# EAGLE board Qwiic_OLED_Breakout-Panel_v11 (EAGLE 9.6.2), part 1 of 3
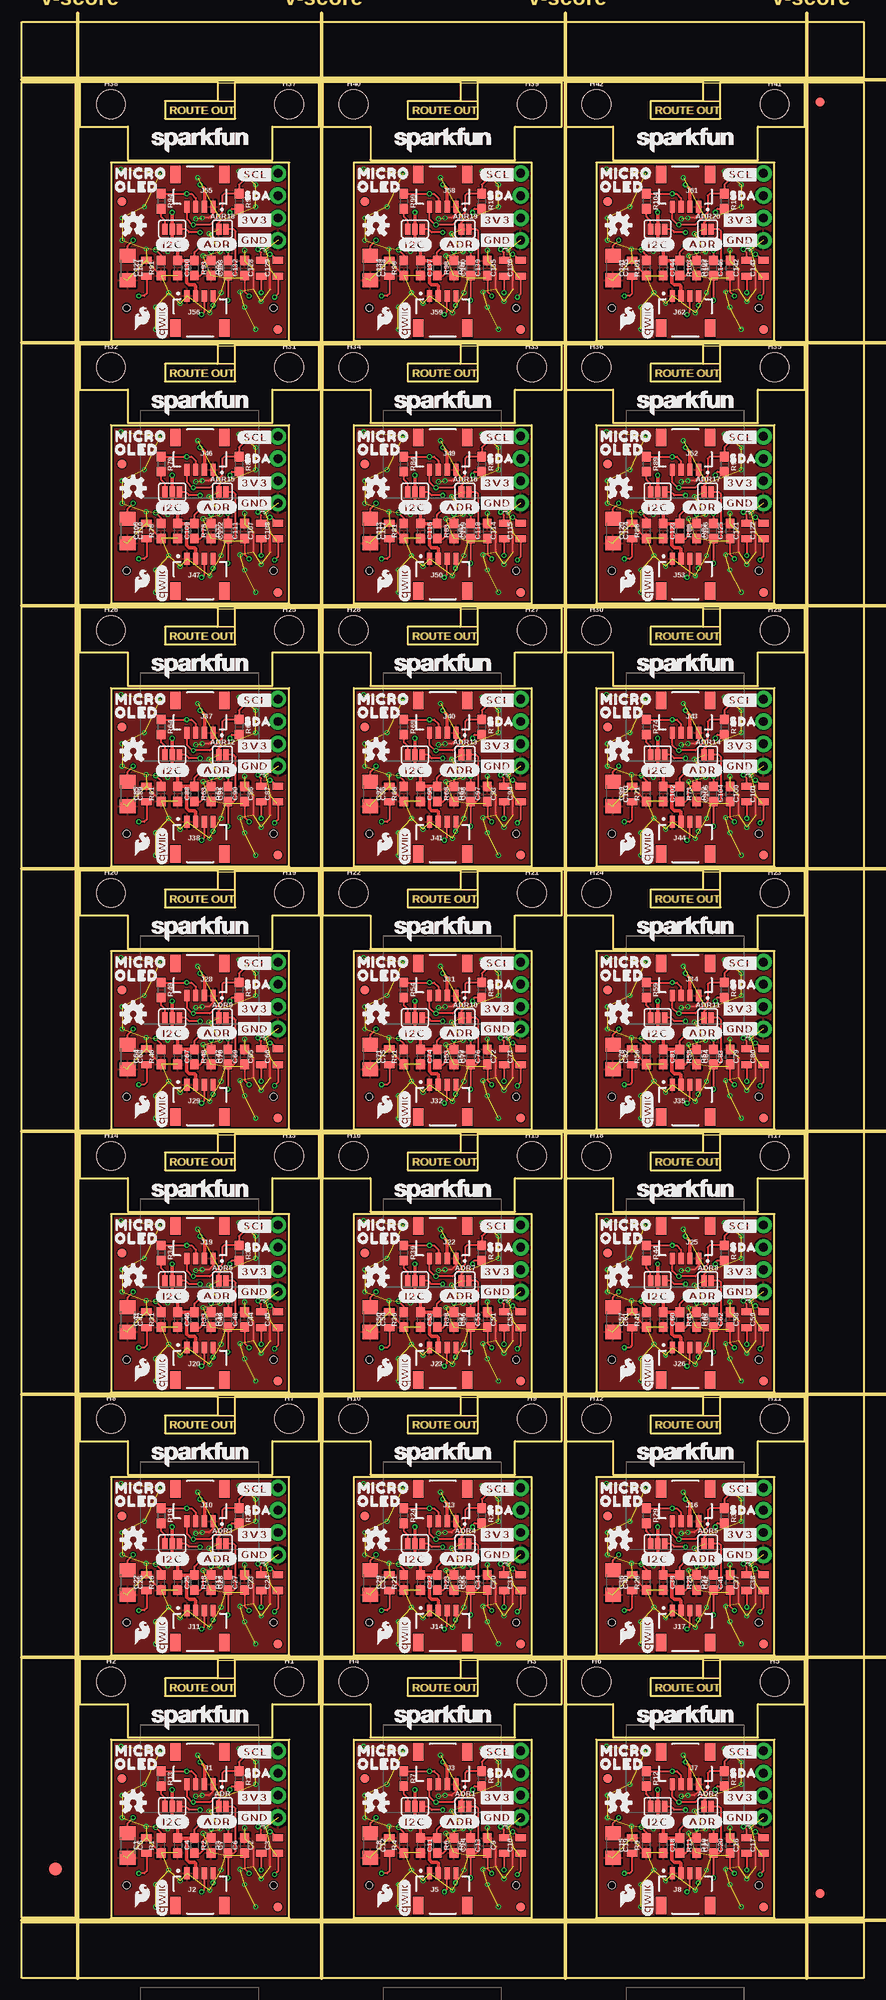
[diagram p0: board, top side]
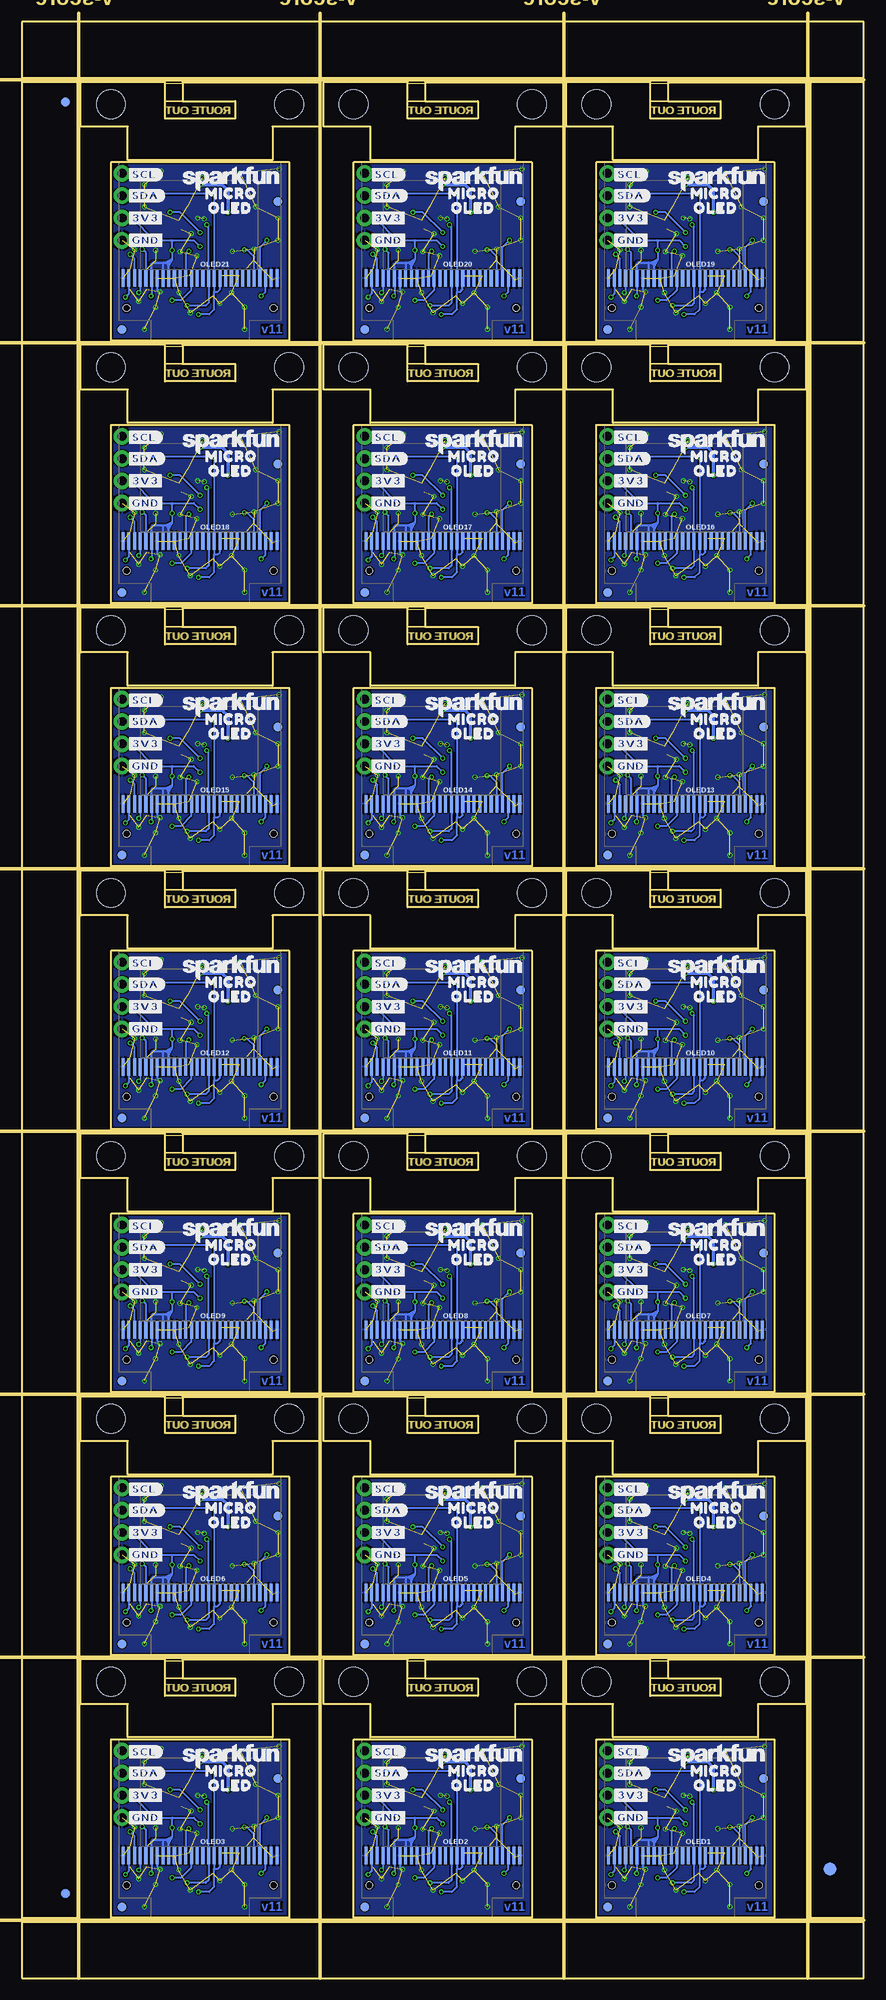
[diagram p1: board, bottom side, seen from below]

Size 96.01 x 223.01 mm. Coordinates in mm from the lower left corner, seen from the top.
Outline: 394 segments
Copper layers (1*16): Top 0.035mm / dielectric 1.5mm / Bottom 0.035mm
Design rules "Qwiic_OLED_Breakout": minimum track width 5mil, minimum drill 0.3mm, track to track 5mil, track to pad 5mil, pad to pad 5mil, via to via 5mil, smd to smd 5mil, copper to edge 7mil, drill to drill 7mil, minimum pad ring 5mil, minimum via ring 5mil, stop-mask expansion 2.5mil, vias tented up to drill 25mil, thermal gap 10mil
Milling: area 16.3,32.2 to 24.3,34.2; area 22.3,34.2 to 24.3,36.2; area 44,32.2 to 52,34.2; area 50,34.2 to 52,36.2; area 71.7,32.2 to 79.7,34.2; area 77.7,34.2 to 79.7,36.2; area 16.3,62.1 to 24.3,64.1; area 22.3,64.1 to 24.3,66.1; area 44,62.1 to 52,64.1; area 50,64.1 to 52,66.1; area 71.7,62.1 to 79.7,64.1; area 77.7,64.1 to 79.7,66.1; 30 more areas; 12 lines

## Footprints (pad centres in the part's own frame; a part is rotated, then mirrored left to right if it is on the bottom)
SMT-JUMPER_2_NO_SILK = smd 0.635 x 1.27: 1 -0.406,0; 2 0.406,0
0805 = smd 0.8 x 1.2: 1 -0.9,0; 2 0.9,0
0603 = smd 1.1 x 1: 1 -0.85,0; 2 0.85,0
1206 = smd 1.6 x 1.8: 1 -1.4,0; 2 1.4,0
FIDUCIAL-1X2 = smd 1 x 1: 1 0,0
FIDUCIAL-1.5X3 = smd 1.5 x 1.5: 1 0,0
STAND-OFF = hole 3.302: 0,0
SMT-JUMPER_3_2-NC_PASTE_SILK = smd 0.635 x 1.27: 1 -0.813,0; 2 0,0; 3 0.813,0
JST04_1MM_RA = smd 0.6 x 1.35: 1 -1.5,0; 2 -0.5,0; 3 0.5,0; 4 1.5,0 | smd 1.2 x 2: NC1 2.8,-3.675; NC2 -2.8,-3.675
1X04_NO_SILK = drill 1.016 pad 1.88: 1 0,0; 2 2.54,0; 3 5.08,0; 4 7.62,0
OLED-0.66-64X48 = smd 0.35 x 2: 1 -8.775,0; 2 -8.125,0; 3 -7.475,0; 4 -6.825,0; 5 -6.175,0; 6 -5.525,0; 7 -4.875,0; 8 -4.225,0; 9 -3.575,0; 10 -2.925,0; 11 -2.275,0; 12 -1.625,0; 13 -0.975,0; 14 -0.325,0; 15 0.325,0; 16 0.975,0; 17 1.625,0; 18 2.275,0; 19 2.925,0; 20 3.575,0; 21 4.225,0; 22 4.875,0; 23 5.525,0; 24 6.175,0; 25 6.825,0; 26 7.475,0; 27 8.125,0; 28 8.775,0 | hole 0.8: 8.375,-3.4; -8.375,-3.4

## Placement (x,y rotation side)
ADR  JUMPER-SMT_2_NO_SILK  [SMT-JUMPER_2_NO_SILK]  22.86,19.56 0 top
ADR1  JUMPER-SMT_2_NO_SILK  [SMT-JUMPER_2_NO_SILK]  50.55,19.56 0 top
ADR2  JUMPER-SMT_2_NO_SILK  [SMT-JUMPER_2_NO_SILK]  78.23,19.56 0 top
ADR3  JUMPER-SMT_2_NO_SILK  [SMT-JUMPER_2_NO_SILK]  22.86,49.53 0 top
ADR4  JUMPER-SMT_2_NO_SILK  [SMT-JUMPER_2_NO_SILK]  50.55,49.53 0 top
ADR5  JUMPER-SMT_2_NO_SILK  [SMT-JUMPER_2_NO_SILK]  78.23,49.53 0 top
ADR6  JUMPER-SMT_2_NO_SILK  [SMT-JUMPER_2_NO_SILK]  22.86,79.5 0 top
ADR7  JUMPER-SMT_2_NO_SILK  [SMT-JUMPER_2_NO_SILK]  50.55,79.5 0 top
ADR8  JUMPER-SMT_2_NO_SILK  [SMT-JUMPER_2_NO_SILK]  78.23,79.5 0 top
ADR9  JUMPER-SMT_2_NO_SILK  [SMT-JUMPER_2_NO_SILK]  22.86,109.47 0 top
ADR10  JUMPER-SMT_2_NO_SILK  [SMT-JUMPER_2_NO_SILK]  50.55,109.47 0 top
ADR11  JUMPER-SMT_2_NO_SILK  [SMT-JUMPER_2_NO_SILK]  78.23,109.47 0 top
ADR12  JUMPER-SMT_2_NO_SILK  [SMT-JUMPER_2_NO_SILK]  22.86,139.45 0 top
ADR13  JUMPER-SMT_2_NO_SILK  [SMT-JUMPER_2_NO_SILK]  50.55,139.45 0 top
ADR14  JUMPER-SMT_2_NO_SILK  [SMT-JUMPER_2_NO_SILK]  78.23,139.45 0 top
ADR15  JUMPER-SMT_2_NO_SILK  [SMT-JUMPER_2_NO_SILK]  22.86,169.42 0 top
ADR16  JUMPER-SMT_2_NO_SILK  [SMT-JUMPER_2_NO_SILK]  50.55,169.42 0 top
ADR17  JUMPER-SMT_2_NO_SILK  [SMT-JUMPER_2_NO_SILK]  78.23,169.42 0 top
ADR18  JUMPER-SMT_2_NO_SILK  [SMT-JUMPER_2_NO_SILK]  22.86,199.39 0 top
ADR19  JUMPER-SMT_2_NO_SILK  [SMT-JUMPER_2_NO_SILK]  50.55,199.39 0 top
ADR20  JUMPER-SMT_2_NO_SILK  [SMT-JUMPER_2_NO_SILK]  78.23,199.39 0 top
C1  2.2uF  [0805]  14.22,15.11 90 top
C2  1.0uF  [0805]  27.3,15.11 90 top
C3  1.0uF  [0805]  29.21,15.11 90 top
C4  1.0uF  [0603]  17.78,15.11 270 top
C5  4.7uF  [1206]  12.06,15.11 270 top
C6  1.0uF  [0603]  25.4,15.11 90 top
C7  1.0uF  [0603]  21.59,15.11 270 top
C8  2.2uF  [0805]  41.91,15.11 90 top
C9  1.0uF  [0805]  54.99,15.11 90 top
C10  1.0uF  [0805]  56.9,15.11 90 top
C11  1.0uF  [0603]  45.47,15.11 270 top
C12  4.7uF  [1206]  39.75,15.11 270 top
C13  1.0uF  [0603]  53.09,15.11 90 top
C14  1.0uF  [0603]  49.28,15.11 270 top
C15  2.2uF  [0805]  69.6,15.11 90 top
C16  1.0uF  [0805]  82.68,15.11 90 top
C17  1.0uF  [0805]  84.58,15.11 90 top
C18  1.0uF  [0603]  73.15,15.11 270 top
C19  4.7uF  [1206]  67.44,15.11 270 top
C20  1.0uF  [0603]  80.77,15.11 90 top
C21  1.0uF  [0603]  76.96,15.11 270 top
C22  2.2uF  [0805]  14.22,45.09 90 top
C23  1.0uF  [0805]  27.3,45.09 90 top
C24  1.0uF  [0805]  29.21,45.09 90 top
C25  1.0uF  [0603]  17.78,45.09 270 top
C26  4.7uF  [1206]  12.06,45.09 270 top
C27  1.0uF  [0603]  25.4,45.09 90 top
C28  1.0uF  [0603]  21.59,45.09 270 top
C29  2.2uF  [0805]  41.91,45.09 90 top
C30  1.0uF  [0805]  54.99,45.09 90 top
C31  1.0uF  [0805]  56.9,45.09 90 top
C32  1.0uF  [0603]  45.47,45.09 270 top
C33  4.7uF  [1206]  39.75,45.09 270 top
C34  1.0uF  [0603]  53.09,45.09 90 top
C35  1.0uF  [0603]  49.28,45.09 270 top
C36  2.2uF  [0805]  69.6,45.09 90 top
C37  1.0uF  [0805]  82.68,45.09 90 top
C38  1.0uF  [0805]  84.58,45.09 90 top
C39  1.0uF  [0603]  73.15,45.09 270 top
C40  4.7uF  [1206]  67.44,45.09 270 top
C41  1.0uF  [0603]  80.77,45.09 90 top
C42  1.0uF  [0603]  76.96,45.09 270 top
C43  2.2uF  [0805]  14.22,75.06 90 top
C44  1.0uF  [0805]  27.3,75.06 90 top
C45  1.0uF  [0805]  29.21,75.06 90 top
C46  1.0uF  [0603]  17.78,75.06 270 top
C47  4.7uF  [1206]  12.06,75.06 270 top
C48  1.0uF  [0603]  25.4,75.06 90 top
C49  1.0uF  [0603]  21.59,75.06 270 top
C50  2.2uF  [0805]  41.91,75.06 90 top
C51  1.0uF  [0805]  54.99,75.06 90 top
C52  1.0uF  [0805]  56.9,75.06 90 top
C53  1.0uF  [0603]  45.47,75.06 270 top
C54  4.7uF  [1206]  39.75,75.06 270 top
C55  1.0uF  [0603]  53.09,75.06 90 top
C56  1.0uF  [0603]  49.28,75.06 270 top
C57  2.2uF  [0805]  69.6,75.06 90 top
C58  1.0uF  [0805]  82.68,75.06 90 top
C59  1.0uF  [0805]  84.58,75.06 90 top
C60  1.0uF  [0603]  73.15,75.06 270 top
C61  4.7uF  [1206]  67.44,75.06 270 top
C62  1.0uF  [0603]  80.77,75.06 90 top
C63  1.0uF  [0603]  76.96,75.06 270 top
C64  2.2uF  [0805]  14.22,105.03 90 top
C65  1.0uF  [0805]  27.3,105.03 90 top
C66  1.0uF  [0805]  29.21,105.03 90 top
C67  1.0uF  [0603]  17.78,105.03 270 top
C68  4.7uF  [1206]  12.06,105.03 270 top
C69  1.0uF  [0603]  25.4,105.03 90 top
C70  1.0uF  [0603]  21.59,105.03 270 top
C71  2.2uF  [0805]  41.91,105.03 90 top
C72  1.0uF  [0805]  54.99,105.03 90 top
C73  1.0uF  [0805]  56.9,105.03 90 top
C74  1.0uF  [0603]  45.47,105.03 270 top
C75  4.7uF  [1206]  39.75,105.03 270 top
C76  1.0uF  [0603]  53.09,105.03 90 top
C77  1.0uF  [0603]  49.28,105.03 270 top
C78  2.2uF  [0805]  69.6,105.03 90 top
C79  1.0uF  [0805]  82.68,105.03 90 top
C80  1.0uF  [0805]  84.58,105.03 90 top
C81  1.0uF  [0603]  73.15,105.03 270 top
C82  4.7uF  [1206]  67.44,105.03 270 top
C83  1.0uF  [0603]  80.77,105.03 90 top
C84  1.0uF  [0603]  76.96,105.03 270 top
C85  2.2uF  [0805]  14.22,135 90 top
C86  1.0uF  [0805]  27.3,135 90 top
C87  1.0uF  [0805]  29.21,135 90 top
C88  1.0uF  [0603]  17.78,135 270 top
C89  4.7uF  [1206]  12.06,135 270 top
C90  1.0uF  [0603]  25.4,135 90 top
C91  1.0uF  [0603]  21.59,135 270 top
C92  2.2uF  [0805]  41.91,135 90 top
C93  1.0uF  [0805]  54.99,135 90 top
C94  1.0uF  [0805]  56.9,135 90 top
C95  1.0uF  [0603]  45.47,135 270 top
C96  4.7uF  [1206]  39.75,135 270 top
C97  1.0uF  [0603]  53.09,135 90 top
C98  1.0uF  [0603]  49.28,135 270 top
C99  2.2uF  [0805]  69.6,135 90 top
C100  1.0uF  [0805]  82.68,135 90 top
C101  1.0uF  [0805]  84.58,135 90 top
C102  1.0uF  [0603]  73.15,135 270 top
C103  4.7uF  [1206]  67.44,135 270 top
C104  1.0uF  [0603]  80.77,135 90 top
C105  1.0uF  [0603]  76.96,135 270 top
C106  2.2uF  [0805]  14.22,164.97 90 top
C107  1.0uF  [0805]  27.3,164.97 90 top
C108  1.0uF  [0805]  29.21,164.97 90 top
C109  1.0uF  [0603]  17.78,164.97 270 top
C110  4.7uF  [1206]  12.06,164.97 270 top
C111  1.0uF  [0603]  25.4,164.97 90 top
C112  1.0uF  [0603]  21.59,164.97 270 top
C113  2.2uF  [0805]  41.91,164.97 90 top
C114  1.0uF  [0805]  54.99,164.97 90 top
C115  1.0uF  [0805]  56.9,164.97 90 top
C116  1.0uF  [0603]  45.47,164.97 270 top
C117  4.7uF  [1206]  39.75,164.97 270 top
C118  1.0uF  [0603]  53.09,164.97 90 top
C119  1.0uF  [0603]  49.28,164.97 270 top
C120  2.2uF  [0805]  69.6,164.97 90 top
C121  1.0uF  [0805]  82.68,164.97 90 top
C122  1.0uF  [0805]  84.58,164.97 90 top
C123  1.0uF  [0603]  73.15,164.97 270 top
C124  4.7uF  [1206]  67.44,164.97 270 top
C125  1.0uF  [0603]  80.77,164.97 90 top
C126  1.0uF  [0603]  76.96,164.97 270 top
C127  2.2uF  [0805]  14.22,194.94 90 top
C128  1.0uF  [0805]  27.3,194.94 90 top
C129  1.0uF  [0805]  29.21,194.94 90 top
C130  1.0uF  [0603]  17.78,194.94 270 top
C131  4.7uF  [1206]  12.06,194.94 270 top
C132  1.0uF  [0603]  25.4,194.94 90 top
C133  1.0uF  [0603]  21.59,194.94 270 top
C134  2.2uF  [0805]  41.91,194.94 90 top
C135  1.0uF  [0805]  54.99,194.94 90 top
C136  1.0uF  [0805]  56.9,194.94 90 top
C137  1.0uF  [0603]  45.47,194.94 270 top
C138  4.7uF  [1206]  39.75,194.94 270 top
C139  1.0uF  [0603]  53.09,194.94 90 top
C140  1.0uF  [0603]  49.28,194.94 270 top
C141  2.2uF  [0805]  69.6,194.94 90 top
C142  1.0uF  [0805]  82.68,194.94 90 top
C143  1.0uF  [0805]  84.58,194.94 90 top
C144  1.0uF  [0603]  73.15,194.94 270 top
C145  4.7uF  [1206]  67.44,194.94 270 top
C146  1.0uF  [0603]  80.77,194.94 90 top
C147  1.0uF  [0603]  76.96,194.94 270 top
E$1  [FIDUCIAL-1X2]  91.06,9.65 0 top
E$2  [FIDUCIAL-1X2]  91.06,9.65 0 bottom
E$3  [FIDUCIAL-1X2]  91.06,213.87 0 top
E$4  [FIDUCIAL-1X2]  91.06,213.87 0 bottom
E$5  [FIDUCIAL-1.5X3]  3.81,12.45 0 top
E$6  [FIDUCIAL-1.5X3]  3.81,12.45 0 bottom
FID1  FIDUCIAL1X2  [FIDUCIAL-1X2]  29.21,8.13 0 top
FID2  FIDUCIAL1X2  [FIDUCIAL-1X2]  11.43,22.73 0 top
FID3  FIDUCIAL1X2  [FIDUCIAL-1X2]  11.43,22.73 0 bottom
FID4  FIDUCIAL1X2  [FIDUCIAL-1X2]  29.21,8.13 0 bottom
FID5  FIDUCIAL1X2  [FIDUCIAL-1X2]  56.9,8.13 0 top
FID6  FIDUCIAL1X2  [FIDUCIAL-1X2]  39.12,22.73 0 top
FID7  FIDUCIAL1X2  [FIDUCIAL-1X2]  39.12,22.73 0 bottom
FID8  FIDUCIAL1X2  [FIDUCIAL-1X2]  56.9,8.13 0 bottom
FID9  FIDUCIAL1X2  [FIDUCIAL-1X2]  84.58,8.13 0 top
FID10  FIDUCIAL1X2  [FIDUCIAL-1X2]  66.8,22.73 0 top
FID11  FIDUCIAL1X2  [FIDUCIAL-1X2]  66.8,22.73 0 bottom
FID12  FIDUCIAL1X2  [FIDUCIAL-1X2]  84.58,8.13 0 bottom
FID13  FIDUCIAL1X2  [FIDUCIAL-1X2]  29.21,38.1 0 top
FID14  FIDUCIAL1X2  [FIDUCIAL-1X2]  11.43,52.7 0 top
FID15  FIDUCIAL1X2  [FIDUCIAL-1X2]  11.43,52.7 0 bottom
FID16  FIDUCIAL1X2  [FIDUCIAL-1X2]  29.21,38.1 0 bottom
FID17  FIDUCIAL1X2  [FIDUCIAL-1X2]  56.9,38.1 0 top
FID18  FIDUCIAL1X2  [FIDUCIAL-1X2]  39.12,52.7 0 top
FID19  FIDUCIAL1X2  [FIDUCIAL-1X2]  39.12,52.7 0 bottom
FID20  FIDUCIAL1X2  [FIDUCIAL-1X2]  56.9,38.1 0 bottom
FID21  FIDUCIAL1X2  [FIDUCIAL-1X2]  84.58,38.1 0 top
FID22  FIDUCIAL1X2  [FIDUCIAL-1X2]  66.8,52.7 0 top
FID23  FIDUCIAL1X2  [FIDUCIAL-1X2]  66.8,52.7 0 bottom
FID24  FIDUCIAL1X2  [FIDUCIAL-1X2]  84.58,38.1 0 bottom
FID25  FIDUCIAL1X2  [FIDUCIAL-1X2]  29.21,68.07 0 top
FID26  FIDUCIAL1X2  [FIDUCIAL-1X2]  11.43,82.68 0 top
FID27  FIDUCIAL1X2  [FIDUCIAL-1X2]  11.43,82.68 0 bottom
FID28  FIDUCIAL1X2  [FIDUCIAL-1X2]  29.21,68.07 0 bottom
FID29  FIDUCIAL1X2  [FIDUCIAL-1X2]  56.9,68.07 0 top
FID30  FIDUCIAL1X2  [FIDUCIAL-1X2]  39.12,82.68 0 top
FID31  FIDUCIAL1X2  [FIDUCIAL-1X2]  39.12,82.68 0 bottom
FID32  FIDUCIAL1X2  [FIDUCIAL-1X2]  56.9,68.07 0 bottom
FID33  FIDUCIAL1X2  [FIDUCIAL-1X2]  84.58,68.07 0 top
FID34  FIDUCIAL1X2  [FIDUCIAL-1X2]  66.8,82.68 0 top
FID35  FIDUCIAL1X2  [FIDUCIAL-1X2]  66.8,82.68 0 bottom
FID36  FIDUCIAL1X2  [FIDUCIAL-1X2]  84.58,68.07 0 bottom
FID37  FIDUCIAL1X2  [FIDUCIAL-1X2]  29.21,98.04 0 top
FID38  FIDUCIAL1X2  [FIDUCIAL-1X2]  11.43,112.65 0 top
FID39  FIDUCIAL1X2  [FIDUCIAL-1X2]  11.43,112.65 0 bottom
FID40  FIDUCIAL1X2  [FIDUCIAL-1X2]  29.21,98.04 0 bottom
FID41  FIDUCIAL1X2  [FIDUCIAL-1X2]  56.9,98.04 0 top
FID42  FIDUCIAL1X2  [FIDUCIAL-1X2]  39.12,112.65 0 top
FID43  FIDUCIAL1X2  [FIDUCIAL-1X2]  39.12,112.65 0 bottom
FID44  FIDUCIAL1X2  [FIDUCIAL-1X2]  56.9,98.04 0 bottom
FID45  FIDUCIAL1X2  [FIDUCIAL-1X2]  84.58,98.04 0 top
FID46  FIDUCIAL1X2  [FIDUCIAL-1X2]  66.8,112.65 0 top
FID47  FIDUCIAL1X2  [FIDUCIAL-1X2]  66.8,112.65 0 bottom
FID48  FIDUCIAL1X2  [FIDUCIAL-1X2]  84.58,98.04 0 bottom
FID49  FIDUCIAL1X2  [FIDUCIAL-1X2]  29.21,128.02 0 top
FID50  FIDUCIAL1X2  [FIDUCIAL-1X2]  11.43,142.62 0 top
FID51  FIDUCIAL1X2  [FIDUCIAL-1X2]  11.43,142.62 0 bottom
FID52  FIDUCIAL1X2  [FIDUCIAL-1X2]  29.21,128.02 0 bottom
FID53  FIDUCIAL1X2  [FIDUCIAL-1X2]  56.9,128.02 0 top
FID54  FIDUCIAL1X2  [FIDUCIAL-1X2]  39.12,142.62 0 top
FID55  FIDUCIAL1X2  [FIDUCIAL-1X2]  39.12,142.62 0 bottom
FID56  FIDUCIAL1X2  [FIDUCIAL-1X2]  56.9,128.02 0 bottom
FID57  FIDUCIAL1X2  [FIDUCIAL-1X2]  84.58,128.02 0 top
FID58  FIDUCIAL1X2  [FIDUCIAL-1X2]  66.8,142.62 0 top
FID59  FIDUCIAL1X2  [FIDUCIAL-1X2]  66.8,142.62 0 bottom
FID60  FIDUCIAL1X2  [FIDUCIAL-1X2]  84.58,128.02 0 bottom
FID61  FIDUCIAL1X2  [FIDUCIAL-1X2]  29.21,157.99 0 top
FID62  FIDUCIAL1X2  [FIDUCIAL-1X2]  11.43,172.59 0 top
FID63  FIDUCIAL1X2  [FIDUCIAL-1X2]  11.43,172.59 0 bottom
FID64  FIDUCIAL1X2  [FIDUCIAL-1X2]  29.21,157.99 0 bottom
FID65  FIDUCIAL1X2  [FIDUCIAL-1X2]  56.9,157.99 0 top
FID66  FIDUCIAL1X2  [FIDUCIAL-1X2]  39.12,172.59 0 top
FID67  FIDUCIAL1X2  [FIDUCIAL-1X2]  39.12,172.59 0 bottom
FID68  FIDUCIAL1X2  [FIDUCIAL-1X2]  56.9,157.99 0 bottom
FID69  FIDUCIAL1X2  [FIDUCIAL-1X2]  84.58,157.99 0 top
FID70  FIDUCIAL1X2  [FIDUCIAL-1X2]  66.8,172.59 0 top
FID71  FIDUCIAL1X2  [FIDUCIAL-1X2]  66.8,172.59 0 bottom
FID72  FIDUCIAL1X2  [FIDUCIAL-1X2]  84.58,157.99 0 bottom
FID73  FIDUCIAL1X2  [FIDUCIAL-1X2]  29.21,187.96 0 top
FID74  FIDUCIAL1X2  [FIDUCIAL-1X2]  11.43,202.56 0 top
FID75  FIDUCIAL1X2  [FIDUCIAL-1X2]  11.43,202.56 0 bottom
FID76  FIDUCIAL1X2  [FIDUCIAL-1X2]  29.21,187.96 0 bottom
FID77  FIDUCIAL1X2  [FIDUCIAL-1X2]  56.9,187.96 0 top
FID78  FIDUCIAL1X2  [FIDUCIAL-1X2]  39.12,202.56 0 top
FID79  FIDUCIAL1X2  [FIDUCIAL-1X2]  39.12,202.56 0 bottom
FID80  FIDUCIAL1X2  [FIDUCIAL-1X2]  56.9,187.96 0 bottom
FID81  FIDUCIAL1X2  [FIDUCIAL-1X2]  84.58,187.96 0 top
FID82  FIDUCIAL1X2  [FIDUCIAL-1X2]  66.8,202.56 0 top
FID83  FIDUCIAL1X2  [FIDUCIAL-1X2]  66.8,202.56 0 bottom
FID84  FIDUCIAL1X2  [FIDUCIAL-1X2]  84.58,187.96 0 bottom
H1  STAND-OFF  [STAND-OFF]  30.48,33.78 0 top
H2  STAND-OFF  [STAND-OFF]  10.16,33.78 0 top
H3  STAND-OFF  [STAND-OFF]  58.17,33.78 0 top
H4  STAND-OFF  [STAND-OFF]  37.85,33.78 0 top
H5  STAND-OFF  [STAND-OFF]  85.85,33.78 0 top
H6  STAND-OFF  [STAND-OFF]  65.53,33.78 0 top
H7  STAND-OFF  [STAND-OFF]  30.48,63.75 0 top
H8  STAND-OFF  [STAND-OFF]  10.16,63.75 0 top
H9  STAND-OFF  [STAND-OFF]  58.17,63.75 0 top
H10  STAND-OFF  [STAND-OFF]  37.85,63.75 0 top
H11  STAND-OFF  [STAND-OFF]  85.85,63.75 0 top
H12  STAND-OFF  [STAND-OFF]  65.53,63.75 0 top
H13  STAND-OFF  [STAND-OFF]  30.48,93.73 0 top
H14  STAND-OFF  [STAND-OFF]  10.16,93.73 0 top
H15  STAND-OFF  [STAND-OFF]  58.17,93.73 0 top
H16  STAND-OFF  [STAND-OFF]  37.85,93.73 0 top
H17  STAND-OFF  [STAND-OFF]  85.85,93.73 0 top
H18  STAND-OFF  [STAND-OFF]  65.53,93.73 0 top
H19  STAND-OFF  [STAND-OFF]  30.48,123.7 0 top
H20  STAND-OFF  [STAND-OFF]  10.16,123.7 0 top
H21  STAND-OFF  [STAND-OFF]  58.17,123.7 0 top
H22  STAND-OFF  [STAND-OFF]  37.85,123.7 0 top
H23  STAND-OFF  [STAND-OFF]  85.85,123.7 0 top
H24  STAND-OFF  [STAND-OFF]  65.53,123.7 0 top
H25  STAND-OFF  [STAND-OFF]  30.48,153.67 0 top
H26  STAND-OFF  [STAND-OFF]  10.16,153.67 0 top
H27  STAND-OFF  [STAND-OFF]  58.17,153.67 0 top
H28  STAND-OFF  [STAND-OFF]  37.85,153.67 0 top
H29  STAND-OFF  [STAND-OFF]  85.85,153.67 0 top
H30  STAND-OFF  [STAND-OFF]  65.53,153.67 0 top
H31  STAND-OFF  [STAND-OFF]  30.48,183.64 0 top
H32  STAND-OFF  [STAND-OFF]  10.16,183.64 0 top
H33  STAND-OFF  [STAND-OFF]  58.17,183.64 0 top
H34  STAND-OFF  [STAND-OFF]  37.85,183.64 0 top
H35  STAND-OFF  [STAND-OFF]  85.85,183.64 0 top
H36  STAND-OFF  [STAND-OFF]  65.53,183.64 0 top
H37  STAND-OFF  [STAND-OFF]  30.48,213.61 0 top
H38  STAND-OFF  [STAND-OFF]  10.16,213.61 0 top
H39  STAND-OFF  [STAND-OFF]  58.17,213.61 0 top
H40  STAND-OFF  [STAND-OFF]  37.85,213.61 0 top
H41  STAND-OFF  [STAND-OFF]  85.85,213.61 0 top
H42  STAND-OFF  [STAND-OFF]  65.53,213.61 0 top
I2C  JUMPER-SMT_3_2-NC_PASTE_SILK  [SMT-JUMPER_3_2-NC_PASTE_SILK]  17.14,19.56 180 top
I2C1  JUMPER-SMT_3_2-NC_PASTE_SILK  [SMT-JUMPER_3_2-NC_PASTE_SILK]  44.83,19.56 180 top
I2C2  JUMPER-SMT_3_2-NC_PASTE_SILK  [SMT-JUMPER_3_2-NC_PASTE_SILK]  72.52,19.56 180 top
I2C3  JUMPER-SMT_3_2-NC_PASTE_SILK  [SMT-JUMPER_3_2-NC_PASTE_SILK]  17.14,49.53 180 top
I2C4  JUMPER-SMT_3_2-NC_PASTE_SILK  [SMT-JUMPER_3_2-NC_PASTE_SILK]  44.83,49.53 180 top
I2C5  JUMPER-SMT_3_2-NC_PASTE_SILK  [SMT-JUMPER_3_2-NC_PASTE_SILK]  72.52,49.53 180 top
I2C6  JUMPER-SMT_3_2-NC_PASTE_SILK  [SMT-JUMPER_3_2-NC_PASTE_SILK]  17.14,79.5 180 top
I2C7  JUMPER-SMT_3_2-NC_PASTE_SILK  [SMT-JUMPER_3_2-NC_PASTE_SILK]  44.83,79.5 180 top
I2C8  JUMPER-SMT_3_2-NC_PASTE_SILK  [SMT-JUMPER_3_2-NC_PASTE_SILK]  72.52,79.5 180 top
I2C9  JUMPER-SMT_3_2-NC_PASTE_SILK  [SMT-JUMPER_3_2-NC_PASTE_SILK]  17.14,109.47 180 top
I2C10  JUMPER-SMT_3_2-NC_PASTE_SILK  [SMT-JUMPER_3_2-NC_PASTE_SILK]  44.83,109.47 180 top
I2C11  JUMPER-SMT_3_2-NC_PASTE_SILK  [SMT-JUMPER_3_2-NC_PASTE_SILK]  72.52,109.47 180 top
I2C12  JUMPER-SMT_3_2-NC_PASTE_SILK  [SMT-JUMPER_3_2-NC_PASTE_SILK]  17.14,139.45 180 top
I2C13  JUMPER-SMT_3_2-NC_PASTE_SILK  [SMT-JUMPER_3_2-NC_PASTE_SILK]  44.83,139.45 180 top
I2C14  JUMPER-SMT_3_2-NC_PASTE_SILK  [SMT-JUMPER_3_2-NC_PASTE_SILK]  72.52,139.45 180 top
I2C15  JUMPER-SMT_3_2-NC_PASTE_SILK  [SMT-JUMPER_3_2-NC_PASTE_SILK]  17.14,169.42 180 top
I2C16  JUMPER-SMT_3_2-NC_PASTE_SILK  [SMT-JUMPER_3_2-NC_PASTE_SILK]  44.83,169.42 180 top
I2C17  JUMPER-SMT_3_2-NC_PASTE_SILK  [SMT-JUMPER_3_2-NC_PASTE_SILK]  72.52,169.42 180 top
I2C18  JUMPER-SMT_3_2-NC_PASTE_SILK  [SMT-JUMPER_3_2-NC_PASTE_SILK]  17.14,199.39 180 top
I2C19  JUMPER-SMT_3_2-NC_PASTE_SILK  [SMT-JUMPER_3_2-NC_PASTE_SILK]  44.83,199.39 180 top
I2C20  JUMPER-SMT_3_2-NC_PASTE_SILK  [SMT-JUMPER_3_2-NC_PASTE_SILK]  72.52,199.39 180 top
J1  QWIIC_RIGHT_ANGLE  [JST04_1MM_RA]  20.32,22.1 180 top
J2  QWIIC_RIGHT_ANGLE  [JST04_1MM_RA]  20.32,11.94 0 top
J3  QWIIC_RIGHT_ANGLE  [JST04_1MM_RA]  48.01,22.1 180 top
J4  [1X04_NO_SILK]  29.21,18.29 90 top
J5  QWIIC_RIGHT_ANGLE  [JST04_1MM_RA]  48.01,11.94 0 top
J6  [1X04_NO_SILK]  56.9,18.29 90 top
J7  QWIIC_RIGHT_ANGLE  [JST04_1MM_RA]  75.69,22.1 180 top
J8  QWIIC_RIGHT_ANGLE  [JST04_1MM_RA]  75.69,11.94 0 top
J9  [1X04_NO_SILK]  84.58,18.29 90 top
J10  QWIIC_RIGHT_ANGLE  [JST04_1MM_RA]  20.32,52.07 180 top
J11  QWIIC_RIGHT_ANGLE  [JST04_1MM_RA]  20.32,41.91 0 top
J12  [1X04_NO_SILK]  29.21,48.26 90 top
J13  QWIIC_RIGHT_ANGLE  [JST04_1MM_RA]  48.01,52.07 180 top
J14  QWIIC_RIGHT_ANGLE  [JST04_1MM_RA]  48.01,41.91 0 top
J15  [1X04_NO_SILK]  56.9,48.26 90 top
J16  QWIIC_RIGHT_ANGLE  [JST04_1MM_RA]  75.69,52.07 180 top
J17  QWIIC_RIGHT_ANGLE  [JST04_1MM_RA]  75.69,41.91 0 top
J18  [1X04_NO_SILK]  84.58,48.26 90 top
J19  QWIIC_RIGHT_ANGLE  [JST04_1MM_RA]  20.32,82.04 180 top
J20  QWIIC_RIGHT_ANGLE  [JST04_1MM_RA]  20.32,71.88 0 top
J21  [1X04_NO_SILK]  29.21,78.23 90 top
J22  QWIIC_RIGHT_ANGLE  [JST04_1MM_RA]  48.01,82.04 180 top
J23  QWIIC_RIGHT_ANGLE  [JST04_1MM_RA]  48.01,71.88 0 top
J24  [1X04_NO_SILK]  56.9,78.23 90 top
J25  QWIIC_RIGHT_ANGLE  [JST04_1MM_RA]  75.69,82.04 180 top
J26  QWIIC_RIGHT_ANGLE  [JST04_1MM_RA]  75.69,71.88 0 top
J27  [1X04_NO_SILK]  84.58,78.23 90 top
J28  QWIIC_RIGHT_ANGLE  [JST04_1MM_RA]  20.32,112.01 180 top
J29  QWIIC_RIGHT_ANGLE  [JST04_1MM_RA]  20.32,101.85 0 top
J30  [1X04_NO_SILK]  29.21,108.2 90 top
J31  QWIIC_RIGHT_ANGLE  [JST04_1MM_RA]  48.01,112.01 180 top
J32  QWIIC_RIGHT_ANGLE  [JST04_1MM_RA]  48.01,101.85 0 top
J33  [1X04_NO_SILK]  56.9,108.2 90 top
J34  QWIIC_RIGHT_ANGLE  [JST04_1MM_RA]  75.69,112.01 180 top
J35  QWIIC_RIGHT_ANGLE  [JST04_1MM_RA]  75.69,101.85 0 top
J36  [1X04_NO_SILK]  84.58,108.2 90 top
J37  QWIIC_RIGHT_ANGLE  [JST04_1MM_RA]  20.32,141.99 180 top
J38  QWIIC_RIGHT_ANGLE  [JST04_1MM_RA]  20.32,131.83 0 top
J39  [1X04_NO_SILK]  29.21,138.18 90 top
J40  QWIIC_RIGHT_ANGLE  [JST04_1MM_RA]  48.01,141.99 180 top
J41  QWIIC_RIGHT_ANGLE  [JST04_1MM_RA]  48.01,131.83 0 top
J42  [1X04_NO_SILK]  56.9,138.18 90 top
J43  QWIIC_RIGHT_ANGLE  [JST04_1MM_RA]  75.69,141.99 180 top
J44  QWIIC_RIGHT_ANGLE  [JST04_1MM_RA]  75.69,131.83 0 top
J45  [1X04_NO_SILK]  84.58,138.18 90 top
J46  QWIIC_RIGHT_ANGLE  [JST04_1MM_RA]  20.32,171.96 180 top
J47  QWIIC_RIGHT_ANGLE  [JST04_1MM_RA]  20.32,161.8 0 top
J48  [1X04_NO_SILK]  29.21,168.15 90 top
J49  QWIIC_RIGHT_ANGLE  [JST04_1MM_RA]  48.01,171.96 180 top
J50  QWIIC_RIGHT_ANGLE  [JST04_1MM_RA]  48.01,161.8 0 top
J51  [1X04_NO_SILK]  56.9,168.15 90 top
J52  QWIIC_RIGHT_ANGLE  [JST04_1MM_RA]  75.69,171.96 180 top
J53  QWIIC_RIGHT_ANGLE  [JST04_1MM_RA]  75.69,161.8 0 top
J54  [1X04_NO_SILK]  84.58,168.15 90 top
J55  QWIIC_RIGHT_ANGLE  [JST04_1MM_RA]  20.32,201.93 180 top
J56  QWIIC_RIGHT_ANGLE  [JST04_1MM_RA]  20.32,191.77 0 top
J57  [1X04_NO_SILK]  29.21,198.12 90 top
J58  QWIIC_RIGHT_ANGLE  [JST04_1MM_RA]  48.01,201.93 180 top
J59  QWIIC_RIGHT_ANGLE  [JST04_1MM_RA]  48.01,191.77 0 top
J60  [1X04_NO_SILK]  56.9,198.12 90 top
J61  QWIIC_RIGHT_ANGLE  [JST04_1MM_RA]  75.69,201.93 180 top
J62  QWIIC_RIGHT_ANGLE  [JST04_1MM_RA]  75.69,191.77 0 top
J63  [1X04_NO_SILK]  84.58,198.12 90 top
LOGO1  OSHW-LOGOS  [OSHW-LOGO-S]  40.39,20 0 top
LOGO2  SFE_LOGO_NAME.1_INCH  [SFE_LOGO_NAME_.1]  20.32,29.72 0 top
LOGO3  OSHW-LOGOS  [OSHW-LOGO-S]  12.7,20 0 top
LOGO4  SFE_LOGO_NAME.1_INCH  [SFE_LOGO_NAME_.1]  16.76,25.27 0 bottom
LOGO5  QWIIC_LOGO_4MM  [QWIIC_4MM]  16,9.14 90 top
LOGO6  QWIIC_LOGO_4MM  [QWIIC_4MM]  43.69,9.14 90 top
LOGO7  SFE_LOGO_NAME.1_INCH  [SFE_LOGO_NAME_.1]  48.01,29.72 0 top
LOGO8  SFE_LOGO_NAME.1_INCH  [SFE_LOGO_NAME_.1]  44.45,25.27 0 bottom
LOGO9  OSHW-LOGOS  [OSHW-LOGO-S]  68.07,20 0 top
LOGO10  QWIIC_LOGO_4MM  [QWIIC_4MM]  71.37,9.14 90 top
LOGO11  SFE_LOGO_NAME.1_INCH  [SFE_LOGO_NAME_.1]  75.69,29.72 0 top
LOGO12  SFE_LOGO_NAME.1_INCH  [SFE_LOGO_NAME_.1]  72.14,25.27 0 bottom
LOGO13  OSHW-LOGOS  [OSHW-LOGO-S]  12.7,49.97 0 top
LOGO14  QWIIC_LOGO_4MM  [QWIIC_4MM]  16,39.12 90 top
LOGO15  SFE_LOGO_NAME.1_INCH  [SFE_LOGO_NAME_.1]  20.32,59.69 0 top
LOGO16  SFE_LOGO_NAME.1_INCH  [SFE_LOGO_NAME_.1]  16.76,55.24 0 bottom
LOGO17  OSHW-LOGOS  [OSHW-LOGO-S]  40.39,49.97 0 top
LOGO18  QWIIC_LOGO_4MM  [QWIIC_4MM]  43.69,39.12 90 top
LOGO19  SFE_LOGO_NAME.1_INCH  [SFE_LOGO_NAME_.1]  48.01,59.69 0 top
LOGO20  SFE_LOGO_NAME.1_INCH  [SFE_LOGO_NAME_.1]  44.45,55.24 0 bottom
LOGO21  OSHW-LOGOS  [OSHW-LOGO-S]  68.07,49.97 0 top
LOGO22  QWIIC_LOGO_4MM  [QWIIC_4MM]  71.37,39.12 90 top
LOGO23  SFE_LOGO_NAME.1_INCH  [SFE_LOGO_NAME_.1]  75.69,59.69 0 top
LOGO24  SFE_LOGO_NAME.1_INCH  [SFE_LOGO_NAME_.1]  72.14,55.24 0 bottom
LOGO25  OSHW-LOGOS  [OSHW-LOGO-S]  12.7,79.95 0 top
LOGO26  QWIIC_LOGO_4MM  [QWIIC_4MM]  16,69.09 90 top
LOGO27  SFE_LOGO_NAME.1_INCH  [SFE_LOGO_NAME_.1]  20.32,89.66 0 top
LOGO28  SFE_LOGO_NAME.1_INCH  [SFE_LOGO_NAME_.1]  16.76,85.22 0 bottom
LOGO29  OSHW-LOGOS  [OSHW-LOGO-S]  40.39,79.95 0 top
LOGO30  QWIIC_LOGO_4MM  [QWIIC_4MM]  43.69,69.09 90 top
LOGO31  SFE_LOGO_NAME.1_INCH  [SFE_LOGO_NAME_.1]  48.01,89.66 0 top
LOGO32  SFE_LOGO_NAME.1_INCH  [SFE_LOGO_NAME_.1]  44.45,85.22 0 bottom
LOGO33  OSHW-LOGOS  [OSHW-LOGO-S]  68.07,79.95 0 top
LOGO34  QWIIC_LOGO_4MM  [QWIIC_4MM]  71.37,69.09 90 top
LOGO35  SFE_LOGO_NAME.1_INCH  [SFE_LOGO_NAME_.1]  75.69,89.66 0 top
LOGO36  SFE_LOGO_NAME.1_INCH  [SFE_LOGO_NAME_.1]  72.14,85.22 0 bottom
LOGO37  OSHW-LOGOS  [OSHW-LOGO-S]  12.7,109.92 0 top
LOGO38  QWIIC_LOGO_4MM  [QWIIC_4MM]  16,99.06 90 top
LOGO39  SFE_LOGO_NAME.1_INCH  [SFE_LOGO_NAME_.1]  20.32,119.63 0 top
LOGO40  SFE_LOGO_NAME.1_INCH  [SFE_LOGO_NAME_.1]  16.76,115.19 0 bottom
LOGO41  OSHW-LOGOS  [OSHW-LOGO-S]  40.39,109.92 0 top
LOGO42  QWIIC_LOGO_4MM  [QWIIC_4MM]  43.69,99.06 90 top
LOGO43  SFE_LOGO_NAME.1_INCH  [SFE_LOGO_NAME_.1]  48.01,119.63 0 top
LOGO44  SFE_LOGO_NAME.1_INCH  [SFE_LOGO_NAME_.1]  44.45,115.19 0 bottom
LOGO45  OSHW-LOGOS  [OSHW-LOGO-S]  68.07,109.92 0 top
LOGO46  QWIIC_LOGO_4MM  [QWIIC_4MM]  71.37,99.06 90 top
LOGO47  SFE_LOGO_NAME.1_INCH  [SFE_LOGO_NAME_.1]  75.69,119.63 0 top
LOGO48  SFE_LOGO_NAME.1_INCH  [SFE_LOGO_NAME_.1]  72.14,115.19 0 bottom
LOGO49  OSHW-LOGOS  [OSHW-LOGO-S]  12.7,139.89 0 top
LOGO50  QWIIC_LOGO_4MM  [QWIIC_4MM]  16,129.03 90 top
LOGO51  SFE_LOGO_NAME.1_INCH  [SFE_LOGO_NAME_.1]  20.32,149.61 0 top
LOGO52  SFE_LOGO_NAME.1_INCH  [SFE_LOGO_NAME_.1]  16.76,145.16 0 bottom
LOGO53  OSHW-LOGOS  [OSHW-LOGO-S]  40.39,139.89 0 top
LOGO54  QWIIC_LOGO_4MM  [QWIIC_4MM]  43.69,129.03 90 top
LOGO55  SFE_LOGO_NAME.1_INCH  [SFE_LOGO_NAME_.1]  48.01,149.61 0 top
LOGO56  SFE_LOGO_NAME.1_INCH  [SFE_LOGO_NAME_.1]  44.45,145.16 0 bottom
LOGO57  OSHW-LOGOS  [OSHW-LOGO-S]  68.07,139.89 0 top
LOGO58  QWIIC_LOGO_4MM  [QWIIC_4MM]  71.37,129.03 90 top
LOGO59  SFE_LOGO_NAME.1_INCH  [SFE_LOGO_NAME_.1]  75.69,149.61 0 top
LOGO60  SFE_LOGO_NAME.1_INCH  [SFE_LOGO_NAME_.1]  72.14,145.16 0 bottom
LOGO61  OSHW-LOGOS  [OSHW-LOGO-S]  12.7,169.86 0 top
LOGO62  QWIIC_LOGO_4MM  [QWIIC_4MM]  16,159 90 top
LOGO63  SFE_LOGO_NAME.1_INCH  [SFE_LOGO_NAME_.1]  20.32,179.58 0 top
LOGO64  SFE_LOGO_NAME.1_INCH  [SFE_LOGO_NAME_.1]  16.76,175.13 0 bottom
LOGO65  OSHW-LOGOS  [OSHW-LOGO-S]  40.39,169.86 0 top
LOGO66  QWIIC_LOGO_4MM  [QWIIC_4MM]  43.69,159 90 top
LOGO67  SFE_LOGO_NAME.1_INCH  [SFE_LOGO_NAME_.1]  48.01,179.58 0 top
LOGO68  SFE_LOGO_NAME.1_INCH  [SFE_LOGO_NAME_.1]  44.45,175.13 0 bottom
LOGO69  OSHW-LOGOS  [OSHW-LOGO-S]  68.07,169.86 0 top
LOGO70  QWIIC_LOGO_4MM  [QWIIC_4MM]  71.37,159 90 top
LOGO71  SFE_LOGO_NAME.1_INCH  [SFE_LOGO_NAME_.1]  75.69,179.58 0 top
LOGO72  SFE_LOGO_NAME.1_INCH  [SFE_LOGO_NAME_.1]  72.14,175.13 0 bottom
LOGO73  OSHW-LOGOS  [OSHW-LOGO-S]  12.7,199.83 0 top
LOGO74  QWIIC_LOGO_4MM  [QWIIC_4MM]  16,188.98 90 top
LOGO75  SFE_LOGO_NAME.1_INCH  [SFE_LOGO_NAME_.1]  20.32,209.55 0 top
LOGO76  SFE_LOGO_NAME.1_INCH  [SFE_LOGO_NAME_.1]  16.76,205.1 0 bottom
LOGO77  OSHW-LOGOS  [OSHW-LOGO-S]  40.39,199.83 0 top
LOGO78  QWIIC_LOGO_4MM  [QWIIC_4MM]  43.69,188.98 90 top
LOGO79  SFE_LOGO_NAME.1_INCH  [SFE_LOGO_NAME_.1]  48.01,209.55 0 top
LOGO80  SFE_LOGO_NAME.1_INCH  [SFE_LOGO_NAME_.1]  44.45,205.1 0 bottom
LOGO81  OSHW-LOGOS  [OSHW-LOGO-S]  68.07,199.83 0 top
LOGO82  QWIIC_LOGO_4MM  [QWIIC_4MM]  71.37,188.98 90 top
LOGO83  SFE_LOGO_NAME.1_INCH  [SFE_LOGO_NAME_.1]  75.69,209.55 0 top
LOGO84  SFE_LOGO_NAME.1_INCH  [SFE_LOGO_NAME_.1]  72.14,205.1 0 bottom
OLED1  OLED0.66  [OLED-0.66-64X48]  20.32,13.97 0 bottom
OLED2  OLED0.66  [OLED-0.66-64X48]  48.01,13.97 0 bottom
OLED3  OLED0.66  [OLED-0.66-64X48]  75.69,13.97 0 bottom
OLED4  OLED0.66  [OLED-0.66-64X48]  20.32,43.94 0 bottom
OLED5  OLED0.66  [OLED-0.66-64X48]  48.01,43.94 0 bottom
OLED6  OLED0.66  [OLED-0.66-64X48]  75.69,43.94 0 bottom
OLED7  OLED0.66  [OLED-0.66-64X48]  20.32,73.91 0 bottom
OLED8  OLED0.66  [OLED-0.66-64X48]  48.01,73.91 0 bottom
OLED9  OLED0.66  [OLED-0.66-64X48]  75.69,73.91 0 bottom
OLED10  OLED0.66  [OLED-0.66-64X48]  20.32,103.89 0 bottom
OLED11  OLED0.66  [OLED-0.66-64X48]  48.01,103.89 0 bottom
OLED12  OLED0.66  [OLED-0.66-64X48]  75.69,103.89 0 bottom
OLED13  OLED0.66  [OLED-0.66-64X48]  20.32,133.86 0 bottom
OLED14  OLED0.66  [OLED-0.66-64X48]  48.01,133.86 0 bottom
OLED15  OLED0.66  [OLED-0.66-64X48]  75.69,133.86 0 bottom
OLED16  OLED0.66  [OLED-0.66-64X48]  20.32,163.83 0 bottom
OLED17  OLED0.66  [OLED-0.66-64X48]  48.01,163.83 0 bottom
OLED18  OLED0.66  [OLED-0.66-64X48]  75.69,163.83 0 bottom
OLED19  OLED0.66  [OLED-0.66-64X48]  20.32,193.8 0 bottom
OLED20  OLED0.66  [OLED-0.66-64X48]  48.01,193.8 0 bottom
OLED21  OLED0.66  [OLED-0.66-64X48]  75.69,193.8 0 bottom
R1  390k  [0603]  15.88,15.11 90 top
R2  10k  [0603]  19.68,15.11 270 top
R3  10k  [0603]  23.5,15.11 90 top
R4  390k  [0603]  43.56,15.11 90 top
R5  10k  [0603]  51.18,15.11 90 top
R6  10k  [0603]  47.37,15.11 270 top
R7  2.2k  [0603]  43.56,22.73 270 top
R8  2.2k  [0603]  52.45,22.73 270 top
R9  390k  [0603]  71.25,15.11 90 top
R10  10k  [0603]  78.87,15.11 90 top
R11  10k  [0603]  75.06,15.11 270 top
R12  2.2k  [0603]  71.25,22.73 270 top
R13  2.2k  [0603]  15.88,22.73 270 top
R14  2.2k  [0603]  24.77,22.73 270 top
R15  2.2k  [0603]  80.14,22.73 270 top
R16  390k  [0603]  15.88,45.09 90 top
R17  10k  [0603]  23.5,45.09 90 top
R18  10k  [0603]  19.68,45.09 270 top
R19  2.2k  [0603]  15.88,52.7 270 top
R20  2.2k  [0603]  24.77,52.7 270 top
R21  390k  [0603]  43.56,45.09 90 top
R22  10k  [0603]  51.18,45.09 90 top
R23  10k  [0603]  47.37,45.09 270 top
R24  2.2k  [0603]  43.56,52.7 270 top
R25  2.2k  [0603]  52.45,52.7 270 top
R26  390k  [0603]  71.25,45.09 90 top
R27  10k  [0603]  78.87,45.09 90 top
R28  10k  [0603]  75.06,45.09 270 top
R29  2.2k  [0603]  71.25,52.7 270 top
R30  2.2k  [0603]  80.14,52.7 270 top
R31  390k  [0603]  15.88,75.06 90 top
R32  10k  [0603]  23.5,75.06 90 top
R33  10k  [0603]  19.68,75.06 270 top
R34  2.2k  [0603]  15.88,82.68 270 top
R35  2.2k  [0603]  24.77,82.68 270 top
R36  390k  [0603]  43.56,75.06 90 top
R37  10k  [0603]  51.18,75.06 90 top
R38  10k  [0603]  47.37,75.06 270 top
R39  2.2k  [0603]  43.56,82.68 270 top
R40  2.2k  [0603]  52.45,82.68 270 top
R41  390k  [0603]  71.25,75.06 90 top
R42  10k  [0603]  78.87,75.06 90 top
R43  10k  [0603]  75.06,75.06 270 top
R44  2.2k  [0603]  71.25,82.68 270 top
R45  2.2k  [0603]  80.14,82.68 270 top
R46  390k  [0603]  15.88,105.03 90 top
R47  10k  [0603]  23.5,105.03 90 top
R48  10k  [0603]  19.68,105.03 270 top
R49  2.2k  [0603]  15.88,112.65 270 top
R50  2.2k  [0603]  24.77,112.65 270 top
R51  390k  [0603]  43.56,105.03 90 top
R52  10k  [0603]  51.18,105.03 90 top
R53  10k  [0603]  47.37,105.03 270 top
R54  2.2k  [0603]  43.56,112.65 270 top
R55  2.2k  [0603]  52.45,112.65 270 top
R56  390k  [0603]  71.25,105.03 90 top
R57  10k  [0603]  78.87,105.03 90 top
R58  10k  [0603]  75.06,105.03 270 top
R59  2.2k  [0603]  71.25,112.65 270 top
R60  2.2k  [0603]  80.14,112.65 270 top
R61  390k  [0603]  15.88,135 90 top
R62  10k  [0603]  23.5,135 90 top
R63  10k  [0603]  19.68,135 270 top
R64  2.2k  [0603]  15.88,142.62 270 top
R65  2.2k  [0603]  24.77,142.62 270 top
R66  390k  [0603]  43.56,135 90 top
R67  10k  [0603]  51.18,135 90 top
R68  10k  [0603]  47.37,135 270 top
R69  2.2k  [0603]  43.56,142.62 270 top
R70  2.2k  [0603]  52.45,142.62 270 top
R71  390k  [0603]  71.25,135 90 top
R72  10k  [0603]  78.87,135 90 top
R73  10k  [0603]  75.06,135 270 top
R74  2.2k  [0603]  71.25,142.62 270 top
R75  2.2k  [0603]  80.14,142.62 270 top
R76  390k  [0603]  15.88,164.97 90 top
R77  10k  [0603]  23.5,164.97 90 top
R78  10k  [0603]  19.68,164.97 270 top
R79  2.2k  [0603]  15.88,172.59 270 top
R80  2.2k  [0603]  24.77,172.59 270 top
R81  390k  [0603]  43.56,164.97 90 top
R82  10k  [0603]  51.18,164.97 90 top
R83  10k  [0603]  47.37,164.97 270 top
R84  2.2k  [0603]  43.56,172.59 270 top
R85  2.2k  [0603]  52.45,172.59 270 top
R86  390k  [0603]  71.25,164.97 90 top
R87  10k  [0603]  78.87,164.97 90 top
R88  10k  [0603]  75.06,164.97 270 top
R89  2.2k  [0603]  71.25,172.59 270 top
R90  2.2k  [0603]  80.14,172.59 270 top
R91  390k  [0603]  15.88,194.94 90 top
R92  10k  [0603]  23.5,194.94 90 top
R93  10k  [0603]  19.68,194.94 270 top
R94  2.2k  [0603]  15.88,202.56 270 top
R95  2.2k  [0603]  24.77,202.56 270 top
R96  390k  [0603]  43.56,194.94 90 top
R97  10k  [0603]  51.18,194.94 90 top
R98  10k  [0603]  47.37,194.94 270 top
R99  2.2k  [0603]  43.56,202.56 270 top
R100  2.2k  [0603]  52.45,202.56 270 top
R101  390k  [0603]  71.25,194.94 90 top
R102  10k  [0603]  78.87,194.94 90 top
R103  10k  [0603]  75.06,194.94 270 top
R104  2.2k  [0603]  71.25,202.56 270 top
R105  2.2k  [0603]  80.14,202.56 270 top
U$1  [MICRO593420]  13.59,25.91 0 top
U$2  [OLED593421]  13.08,24.38 0 top
U$3  [#ADR#5]  22.25,17.83 0 top
U$4  [#SCL#9]  26.67,25.78 0 top
U$5  [#3V3#1]  26.54,20.57 0 top
U$6  [#GND#0]  26.54,18.29 0 top
U$7  [SDA8]  26.92,23.37 0 top
U$8  [#I2C#1348]  17.17,17.78 0 top
U$9  [#SCL#8]  26.67,25.78 0 bottom
U$10  [#SDA#10]  26.54,23.37 0 bottom
U$11  [#3V3#1]  26.54,20.83 0 bottom
U$12  [#GND#0]  26.54,18.29 0 bottom
U$13  [MICRO593420]  16.76,23.62 0 bottom
U$14  [OLED593421]  16.89,21.97 0 bottom
U$15  [SFE_LOGO_FLAME_.1]  13.72,9.4 0 top
U$16  [MICRO593420]  41.27,25.91 0 top
U$17  [OLED593421]  40.77,24.38 0 top
U$18  [#ADR#5]  49.94,17.83 0 top
U$19  [#SCL#9]  54.36,25.78 0 top
U$20  [#3V3#1]  54.23,20.57 0 top
U$21  [#GND#0]  54.23,18.29 0 top
U$22  [SDA8]  54.61,23.37 0 top
U$23  [#I2C#1348]  44.86,17.78 0 top
U$24  [#SCL#8]  54.36,25.78 0 bottom
U$25  [#SDA#10]  54.23,23.37 0 bottom
U$26  [#3V3#1]  54.23,20.83 0 bottom
U$27  [#GND#0]  54.23,18.29 0 bottom
U$28  [MICRO593420]  44.45,23.62 0 bottom
U$29  [OLED593421]  44.58,21.97 0 bottom
U$30  [SFE_LOGO_FLAME_.1]  41.4,9.4 0 top
U$31  [MICRO593420]  68.96,25.91 0 top
U$32  [OLED593421]  68.45,24.38 0 top
U$33  [#ADR#5]  77.62,17.83 0 top
U$34  [#SCL#9]  82.04,25.78 0 top
U$35  [#3V3#1]  81.92,20.57 0 top
U$36  [#GND#0]  81.92,18.29 0 top
U$37  [SDA8]  82.3,23.37 0 top
U$38  [#I2C#1348]  72.54,17.78 0 top
U$39  [#SCL#8]  82.04,25.78 0 bottom
U$40  [#SDA#10]  81.92,23.37 0 bottom
U$41  [#3V3#1]  81.92,20.83 0 bottom
U$42  [#GND#0]  81.92,18.29 0 bottom
U$43  [MICRO593420]  72.14,23.62 0 bottom
U$44  [OLED593421]  72.26,21.97 0 bottom
U$45  [SFE_LOGO_FLAME_.1]  69.09,9.4 0 top
U$46  [MICRO593420]  13.59,55.88 0 top
U$47  [OLED593421]  13.08,54.36 0 top
U$48  [#ADR#5]  22.25,47.8 0 top
U$49  [#SCL#9]  26.67,55.75 0 top
U$50  [#3V3#1]  26.54,50.55 0 top
U$51  [#GND#0]  26.54,48.26 0 top
U$52  [SDA8]  26.92,53.34 0 top
U$53  [#I2C#1348]  17.17,47.75 0 top
U$54  [#SCL#8]  26.67,55.75 0 bottom
U$55  [#SDA#10]  26.54,53.34 0 bottom
U$56  [#3V3#1]  26.54,50.8 0 bottom
U$57  [#GND#0]  26.54,48.26 0 bottom
U$58  [MICRO593420]  16.76,53.59 0 bottom
U$59  [OLED593421]  16.89,51.94 0 bottom
U$60  [SFE_LOGO_FLAME_.1]  13.72,39.37 0 top
U$61  [MICRO593420]  41.27,55.88 0 top
U$62  [OLED593421]  40.77,54.36 0 top
U$63  [#ADR#5]  49.94,47.8 0 top
U$64  [#SCL#9]  54.36,55.75 0 top
U$65  [#3V3#1]  54.23,50.55 0 top
U$66  [#GND#0]  54.23,48.26 0 top
U$67  [SDA8]  54.61,53.34 0 top
U$68  [#I2C#1348]  44.86,47.75 0 top
U$69  [#SCL#8]  54.36,55.75 0 bottom
U$70  [#SDA#10]  54.23,53.34 0 bottom
U$71  [#3V3#1]  54.23,50.8 0 bottom
U$72  [#GND#0]  54.23,48.26 0 bottom
U$73  [MICRO593420]  44.45,53.59 0 bottom
U$74  [OLED593421]  44.58,51.94 0 bottom
U$75  [SFE_LOGO_FLAME_.1]  41.4,39.37 0 top
U$76  [MICRO593420]  68.96,55.88 0 top
U$77  [OLED593421]  68.45,54.36 0 top
U$78  [#ADR#5]  77.62,47.8 0 top
U$79  [#SCL#9]  82.04,55.75 0 top
U$80  [#3V3#1]  81.92,50.55 0 top
U$81  [#GND#0]  81.92,48.26 0 top
U$82  [SDA8]  82.3,53.34 0 top
U$83  [#I2C#1348]  72.54,47.75 0 top
U$84  [#SCL#8]  82.04,55.75 0 bottom
U$85  [#SDA#10]  81.92,53.34 0 bottom
U$86  [#3V3#1]  81.92,50.8 0 bottom
U$87  [#GND#0]  81.92,48.26 0 bottom
U$88  [MICRO593420]  72.14,53.59 0 bottom
U$89  [OLED593421]  72.26,51.94 0 bottom
U$90  [SFE_LOGO_FLAME_.1]  69.09,39.37 0 top
U$91  [MICRO593420]  13.59,85.85 0 top
U$92  [OLED593421]  13.08,84.33 0 top
U$93  [#ADR#5]  22.25,77.77 0 top
U$94  [#SCL#9]  26.67,85.72 0 top
U$95  [#3V3#1]  26.54,80.52 0 top
U$96  [#GND#0]  26.54,78.23 0 top
U$97  [SDA8]  26.92,83.31 0 top
U$98  [#I2C#1348]  17.17,77.72 0 top
U$99  [#SCL#8]  26.67,85.72 0 bottom
U$100  [#SDA#10]  26.54,83.31 0 bottom
U$101  [#3V3#1]  26.54,80.77 0 bottom
U$102  [#GND#0]  26.54,78.23 0 bottom
U$103  [MICRO593420]  16.76,83.57 0 bottom
U$104  [OLED593421]  16.89,81.92 0 bottom
U$105  [SFE_LOGO_FLAME_.1]  13.72,69.34 0 top
U$106  [MICRO593420]  41.27,85.85 0 top
U$107  [OLED593421]  40.77,84.33 0 top
U$108  [#ADR#5]  49.94,77.77 0 top
U$109  [#SCL#9]  54.36,85.72 0 top
U$110  [#3V3#1]  54.23,80.52 0 top
U$111  [#GND#0]  54.23,78.23 0 top
U$112  [SDA8]  54.61,83.31 0 top
U$113  [#I2C#1348]  44.86,77.72 0 top
U$114  [#SCL#8]  54.36,85.72 0 bottom
U$115  [#SDA#10]  54.23,83.31 0 bottom
U$116  [#3V3#1]  54.23,80.77 0 bottom
U$117  [#GND#0]  54.23,78.23 0 bottom
U$118  [MICRO593420]  44.45,83.57 0 bottom
U$119  [OLED593421]  44.58,81.92 0 bottom
U$120  [SFE_LOGO_FLAME_.1]  41.4,69.34 0 top
U$121  [MICRO593420]  68.96,85.85 0 top
U$122  [OLED593421]  68.45,84.33 0 top
U$123  [#ADR#5]  77.62,77.77 0 top
U$124  [#SCL#9]  82.04,85.72 0 top
U$125  [#3V3#1]  81.92,80.52 0 top
U$126  [#GND#0]  81.92,78.23 0 top
U$127  [SDA8]  82.3,83.31 0 top
U$128  [#I2C#1348]  72.54,77.72 0 top
U$129  [#SCL#8]  82.04,85.72 0 bottom
U$130  [#SDA#10]  81.92,83.31 0 bottom
U$131  [#3V3#1]  81.92,80.77 0 bottom
U$132  [#GND#0]  81.92,78.23 0 bottom
U$133  [MICRO593420]  72.14,83.57 0 bottom
U$134  [OLED593421]  72.26,81.92 0 bottom
U$135  [SFE_LOGO_FLAME_.1]  69.09,69.34 0 top
U$136  [MICRO593420]  13.59,115.82 0 top
U$137  [OLED593421]  13.08,114.3 0 top
U$138  [#ADR#5]  22.25,107.75 0 top
U$139  [#SCL#9]  26.67,115.7 0 top
U$140  [#3V3#1]  26.54,110.49 0 top
U$141  [#GND#0]  26.54,108.2 0 top
U$142  [SDA8]  26.92,113.28 0 top
U$143  [#I2C#1348]  17.17,107.7 0 top
U$144  [#SCL#8]  26.67,115.7 0 bottom
U$145  [#SDA#10]  26.54,113.28 0 bottom
U$146  [#3V3#1]  26.54,110.74 0 bottom
U$147  [#GND#0]  26.54,108.2 0 bottom
U$148  [MICRO593420]  16.76,113.54 0 bottom
U$149  [OLED593421]  16.89,111.89 0 bottom
U$150  [SFE_LOGO_FLAME_.1]  13.72,99.31 0 top
U$151  [MICRO593420]  41.27,115.82 0 top
U$152  [OLED593421]  40.77,114.3 0 top
U$153  [#ADR#5]  49.94,107.75 0 top
U$154  [#SCL#9]  54.36,115.7 0 top
U$155  [#3V3#1]  54.23,110.49 0 top
U$156  [#GND#0]  54.23,108.2 0 top
U$157  [SDA8]  54.61,113.28 0 top
U$158  [#I2C#1348]  44.86,107.7 0 top
U$159  [#SCL#8]  54.36,115.7 0 bottom
U$160  [#SDA#10]  54.23,113.28 0 bottom
U$161  [#3V3#1]  54.23,110.74 0 bottom
U$162  [#GND#0]  54.23,108.2 0 bottom
U$163  [MICRO593420]  44.45,113.54 0 bottom
U$164  [OLED593421]  44.58,111.89 0 bottom
U$165  [SFE_LOGO_FLAME_.1]  41.4,99.31 0 top
U$166  [MICRO593420]  68.96,115.82 0 top
U$167  [OLED593421]  68.45,114.3 0 top
U$168  [#ADR#5]  77.62,107.75 0 top
U$169  [#SCL#9]  82.04,115.7 0 top
U$170  [#3V3#1]  81.92,110.49 0 top
U$171  [#GND#0]  81.92,108.2 0 top
U$172  [SDA8]  82.3,113.28 0 top
U$173  [#I2C#1348]  72.54,107.7 0 top
U$174  [#SCL#8]  82.04,115.7 0 bottom
U$175  [#SDA#10]  81.92,113.28 0 bottom
U$176  [#3V3#1]  81.92,110.74 0 bottom
U$177  [#GND#0]  81.92,108.2 0 bottom
U$178  [MICRO593420]  72.14,113.54 0 bottom
U$179  [OLED593421]  72.26,111.89 0 bottom
U$180  [SFE_LOGO_FLAME_.1]  69.09,99.31 0 top
U$181  [MICRO593420]  13.59,145.8 0 top
U$182  [OLED593421]  13.08,144.27 0 top
U$183  [#ADR#5]  22.25,137.72 0 top
U$184  [#SCL#9]  26.67,145.67 0 top
U$185  [#3V3#1]  26.54,140.46 0 top
U$186  [#GND#0]  26.54,138.18 0 top
U$187  [SDA8]  26.92,143.26 0 top
U$188  [#I2C#1348]  17.17,137.67 0 top
U$189  [#SCL#8]  26.67,145.67 0 bottom
U$190  [#SDA#10]  26.54,143.26 0 bottom
U$191  [#3V3#1]  26.54,140.72 0 bottom
U$192  [#GND#0]  26.54,138.18 0 bottom
U$193  [MICRO593420]  16.76,143.51 0 bottom
U$194  [OLED593421]  16.89,141.86 0 bottom
U$195  [SFE_LOGO_FLAME_.1]  13.72,129.29 0 top
U$196  [MICRO593420]  41.27,145.8 0 top
U$197  [OLED593421]  40.77,144.27 0 top
U$198  [#ADR#5]  49.94,137.72 0 top
U$199  [#SCL#9]  54.36,145.67 0 top
U$200  [#3V3#1]  54.23,140.46 0 top
U$201  [#GND#0]  54.23,138.18 0 top
U$202  [SDA8]  54.61,143.26 0 top
U$203  [#I2C#1348]  44.86,137.67 0 top
U$204  [#SCL#8]  54.36,145.67 0 bottom
U$205  [#SDA#10]  54.23,143.26 0 bottom
U$206  [#3V3#1]  54.23,140.72 0 bottom
U$207  [#GND#0]  54.23,138.18 0 bottom
U$208  [MICRO593420]  44.45,143.51 0 bottom
U$209  [OLED593421]  44.58,141.86 0 bottom
U$210  [SFE_LOGO_FLAME_.1]  41.4,129.29 0 top
U$211  [MICRO593420]  68.96,145.8 0 top
U$212  [OLED593421]  68.45,144.27 0 top
U$213  [#ADR#5]  77.62,137.72 0 top
U$214  [#SCL#9]  82.04,145.67 0 top
U$215  [#3V3#1]  81.92,140.46 0 top
U$216  [#GND#0]  81.92,138.18 0 top
U$217  [SDA8]  82.3,143.26 0 top
U$218  [#I2C#1348]  72.54,137.67 0 top
U$219  [#SCL#8]  82.04,145.67 0 bottom
U$220  [#SDA#10]  81.92,143.26 0 bottom
U$221  [#3V3#1]  81.92,140.72 0 bottom
U$222  [#GND#0]  81.92,138.18 0 bottom
U$223  [MICRO593420]  72.14,143.51 0 bottom
U$224  [OLED593421]  72.26,141.86 0 bottom
U$225  [SFE_LOGO_FLAME_.1]  69.09,129.29 0 top
U$226  [MICRO593420]  13.59,175.77 0 top
U$227  [OLED593421]  13.08,174.24 0 top
U$228  [#ADR#5]  22.25,167.69 0 top
U$229  [#SCL#9]  26.67,175.64 0 top
U$230  [#3V3#1]  26.54,170.43 0 top
U$231  [#GND#0]  26.54,168.15 0 top
U$232  [SDA8]  26.92,173.23 0 top
U$233  [#I2C#1348]  17.17,167.64 0 top
U$234  [#SCL#8]  26.67,175.64 0 bottom
U$235  [#SDA#10]  26.54,173.23 0 bottom
U$236  [#3V3#1]  26.54,170.69 0 bottom
U$237  [#GND#0]  26.54,168.15 0 bottom
U$238  [MICRO593420]  16.76,173.48 0 bottom
U$239  [OLED593421]  16.89,171.83 0 bottom
U$240  [SFE_LOGO_FLAME_.1]  13.72,159.26 0 top
U$241  [MICRO593420]  41.27,175.77 0 top
U$242  [OLED593421]  40.77,174.24 0 top
U$243  [#ADR#5]  49.94,167.69 0 top
U$244  [#SCL#9]  54.36,175.64 0 top
U$245  [#3V3#1]  54.23,170.43 0 top
U$246  [#GND#0]  54.23,168.15 0 top
U$247  [SDA8]  54.61,173.23 0 top
U$248  [#I2C#1348]  44.86,167.64 0 top
U$249  [#SCL#8]  54.36,175.64 0 bottom
U$250  [#SDA#10]  54.23,173.23 0 bottom
U$251  [#3V3#1]  54.23,170.69 0 bottom
U$252  [#GND#0]  54.23,168.15 0 bottom
U$253  [MICRO593420]  44.45,173.48 0 bottom
U$254  [OLED593421]  44.58,171.83 0 bottom
U$255  [SFE_LOGO_FLAME_.1]  41.4,159.26 0 top
U$256  [MICRO593420]  68.96,175.77 0 top
U$257  [OLED593421]  68.45,174.24 0 top
U$258  [#ADR#5]  77.62,167.69 0 top
U$259  [#SCL#9]  82.04,175.64 0 top
U$260  [#3V3#1]  81.92,170.43 0 top
U$261  [#GND#0]  81.92,168.15 0 top
U$262  [SDA8]  82.3,173.23 0 top
U$263  [#I2C#1348]  72.54,167.64 0 top
U$264  [#SCL#8]  82.04,175.64 0 bottom
U$265  [#SDA#10]  81.92,173.23 0 bottom
U$266  [#3V3#1]  81.92,170.69 0 bottom
U$267  [#GND#0]  81.92,168.15 0 bottom
U$268  [MICRO593420]  72.14,173.48 0 bottom
U$269  [OLED593421]  72.26,171.83 0 bottom
U$270  [SFE_LOGO_FLAME_.1]  69.09,159.26 0 top
U$271  [MICRO593420]  13.59,205.74 0 top
U$272  [OLED593421]  13.08,204.22 0 top
U$273  [#ADR#5]  22.25,197.66 0 top
U$274  [#SCL#9]  26.67,205.61 0 top
U$275  [#3V3#1]  26.54,200.41 0 top
U$276  [#GND#0]  26.54,198.12 0 top
U$277  [SDA8]  26.92,203.2 0 top
U$278  [#I2C#1348]  17.17,197.61 0 top
U$279  [#SCL#8]  26.67,205.61 0 bottom
U$280  [#SDA#10]  26.54,203.2 0 bottom
U$281  [#3V3#1]  26.54,200.66 0 bottom
U$282  [#GND#0]  26.54,198.12 0 bottom
U$283  [MICRO593420]  16.76,203.45 0 bottom
U$284  [OLED593421]  16.89,201.8 0 bottom
U$285  [SFE_LOGO_FLAME_.1]  13.72,189.23 0 top
U$286  [MICRO593420]  41.27,205.74 0 top
U$287  [OLED593421]  40.77,204.22 0 top
U$288  [#ADR#5]  49.94,197.66 0 top
U$289  [#SCL#9]  54.36,205.61 0 top
U$290  [#3V3#1]  54.23,200.41 0 top
U$291  [#GND#0]  54.23,198.12 0 top
U$292  [SDA8]  54.61,203.2 0 top
U$293  [#I2C#1348]  44.86,197.61 0 top
U$294  [#SCL#8]  54.36,205.61 0 bottom
U$295  [#SDA#10]  54.23,203.2 0 bottom
U$296  [#3V3#1]  54.23,200.66 0 bottom
U$297  [#GND#0]  54.23,198.12 0 bottom
U$298  [MICRO593420]  44.45,203.45 0 bottom
U$299  [OLED593421]  44.58,201.8 0 bottom
U$300  [SFE_LOGO_FLAME_.1]  41.4,189.23 0 top
U$301  [MICRO593420]  68.96,205.74 0 top
U$302  [OLED593421]  68.45,204.22 0 top
U$303  [#ADR#5]  77.62,197.66 0 top
U$304  [#SCL#9]  82.04,205.61 0 top
U$305  [#3V3#1]  81.92,200.41 0 top
U$306  [#GND#0]  81.92,198.12 0 top
U$307  [SDA8]  82.3,203.2 0 top
U$308  [#I2C#1348]  72.54,197.61 0 top
U$309  [#SCL#8]  82.04,205.61 0 bottom
U$310  [#SDA#10]  81.92,203.2 0 bottom
U$311  [#3V3#1]  81.92,200.66 0 bottom
U$312  [#GND#0]  81.92,198.12 0 bottom
U$313  [MICRO593420]  72.14,203.45 0 bottom
U$314  [OLED593421]  72.26,201.8 0 bottom
U$315  [SFE_LOGO_FLAME_.1]  69.09,189.23 0 top

## Library data of the parts
ADR ADR1-ADR20 I2C I2C1-I2C20 = SparkFun-Jumpers
C1 C8 C15 C22 C29 C36 C43 C50 C57 C64 C71 C78 C85 C92 C99 C106 C113 C120 C127 C134 C141 = SparkFun-Capacitors; PROD_ID: CAP-11624
C2 C3 C9 C10 C16 C17 C23 C24 C30 C31 C37 C38 C44 C45 C51 C52 C58 C59 C65 C66 C72 C73 C79 C80 C86 C87 C93 C94 C100 C101 C107 C108 C114 C115 C121 C122 C128 C129 C135 C136 C142 C143 = SparkFun-Capacitors; PROD_ID: CAP-08064
C4 C6 C7 C11 C13 C14 C18 C20 C21 C25 C27 C28 C32 C34 C35 C39 C41 C42 C46 C48 C49 C53 C55 C56 C60 C62 C63 C67 C69 C70 C74 C76 C77 C81 C83 C84 C88 C90 C91 C95 C97 C98 C102 C104 C105 C109 C111 C112 C116 C118 C119 C123 C125 C126 C130 C132 C133 C137 C139 C140 C144 C146 C147 = SparkFun-Capacitors; PROD_ID: CAP-00868
C5 C12 C19 C26 C33 C40 C47 C54 C61 C68 C75 C82 C89 C96 C103 C110 C117 C124 C131 C138 C145 = SparkFun-Capacitors; PROD_ID: CAP-10300
E$1-E$4 FID1-FID84 LOGO1-LOGO84 U$15 U$30 U$45 U$60 U$75 U$90 U$105 U$120 U$135 U$150 U$165 U$180 U$195 U$210 U$225 U$240 U$255 U$270 U$285 U$300 U$315 = SparkFun-Aesthetics
E$5 E$6 = SparkFun-Retired
H1-H42 = SparkFun-Hardware
J1-J3 J5 J7 J8 J10 J11 J13 J14 J16 J17 J19 J20 J22 J23 J25 J26 J28 J29 J31 J32 J34 J35 J37 J38 J40 J41 J43 J44 J46 J47 J49 J50 J52 J53 J55 J56 J58 J59 J61 J62 = SparkFun-Connectors; PROD_ID: CONN-13694
J4 J6 J9 J12 J15 J18 J21 J24 J27 J30 J33 J36 J39 J42 J45 J48 J51 J54 J57 J60 J63 = SparkFun-Connectors
OLED1-OLED21 = SparkFun-Displays; PROD_ID: LCD-12019
R1 R4 R9 R16 R21 R26 R31 R36 R41 R46 R51 R56 R61 R66 R71 R76 R81 R86 R91 R96 R101 = SparkFun-Resistors; PROD_ID: RES-12024
R2 R3 R5 R6 R10 R11 R17 R18 R22 R23 R27 R28 R32 R33 R37 R38 R42 R43 R47 R48 R52 R53 R57 R58 R62 R63 R67 R68 R72 R73 R77 R78 R82 R83 R87 R88 R92 R93 R97 R98 R102 R103 = SparkFun-Resistors; PROD_ID: RES-00824
R7 R8 R12-R15 R19 R20 R24 R25 R29 R30 R34 R35 R39 R40 R44 R45 R49 R50 R54 R55 R59 R60 R64 R65 R69 R70 R74 R75 R79 R80 R84 R85 R89 R90 R94 R95 R99 R100 R104 R105 = SparkFun-Resistors; PROD_ID: RES-08272
U$1-U$3 U$5-U$7 U$11-U$14 U$16-U$18 U$20-U$22 U$26-U$29 U$31-U$33 U$35-U$37 U$41-U$44 U$46-U$48 U$50-U$52 U$56-U$59 U$61-U$63 U$65-U$67 U$71-U$74 U$76-U$78 U$80-U$82 U$86-U$89 U$91-U$93 U$95-U$97 U$101-U$104 U$106-U$108 U$110-U$112 U$116-U$119 U$121-U$123 U$125-U$127 U$131-U$134 U$136-U$138 U$140-U$142 U$146-U$149 U$151-U$153 U$155-U$157 U$161-U$164 U$166-U$168 U$170-U$172 U$176-U$179 U$181-U$183 U$185-U$187 U$191-U$194 U$196-U$198 U$200-U$202 U$206-U$209 U$211-U$213 U$215-U$217 U$221-U$224 U$226-U$228 U$230-U$232 U$236-U$239 U$241-U$243 U$245-U$247 U$251-U$254 U$256-U$258 U$260-U$262 U$266-U$269 U$271-U$273 U$275-U$277 U$281-U$284 U$286-U$288 U$290-U$292 U$296-U$299 U$301-U$303 U$305-U$307 U$311-U$314 = pot
U$4 U$19 U$34 U$49 U$64 U$79 U$94 U$109 U$124 U$139 U$154 U$169 U$184 U$199 U$214 U$229 U$244 U$259 U$274 U$289 U$304 = bot
U$8 U$23 U$38 U$53 U$68 U$83 U$98 U$113 U$128 U$143 U$158 U$173 U$188 U$203 U$218 U$233 U$248 U$263 U$278 U$293 U$308 = topmirror
U$9 U$24 U$39 U$54 U$69 U$84 U$99 U$114 U$129 U$144 U$159 U$174 U$189 U$204 U$219 U$234 U$249 U$264 U$279 U$294 U$309 = top
U$10 U$25 U$40 U$55 U$70 U$85 U$100 U$115 U$130 U$145 U$160 U$175 U$190 U$205 U$220 U$235 U$250 U$265 U$280 U$295 U$310 = botmirror